# EAGLE board omnetics_nano_breakout_v2 (EAGLE 8.2.2)
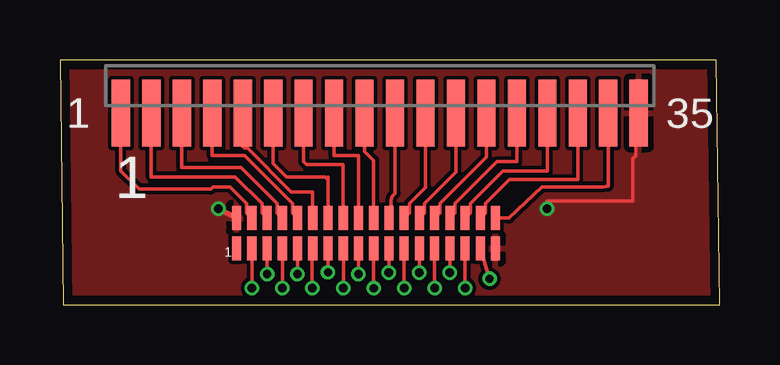
[diagram p0: board, top side]
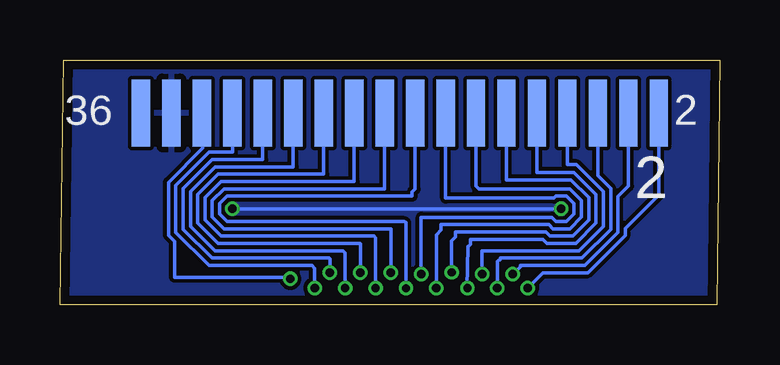
[diagram p1: board, bottom side, seen from below]

Size 27.51 x 10.21 mm. Coordinates in mm from the lower left corner, seen from the top.
Outline: 0.13,0 27.51,0 27.36,10.21 0,10.21 0.13,0
Copper layers (1*16): Top 0.035559375mm / dielectric 1.6mm / Bottom 0.035559375mm
Design rules "oshpark-2layer": minimum track width 6mil, minimum drill 10mil, track to track 6mil, track to pad 6mil, pad to pad 6mil, via to via 6mil, smd to smd 6mil, copper to edge 15mil, drill to drill 6mil, minimum pad ring 5mil, minimum via ring 5mil, stop-mask expansion 2.5mil, vias tented up to drill 0mil, thermal gap 10mil

## Footprints (pad centres in the part's own frame; a part is rotated, then mirrored left to right if it is on the bottom)
SFMC-118-L1-S-D = smd 0.762 x 2.794: 1 -10.795,-2.032; 3 -9.525,-2.032; 5 -8.255,-2.032; 7 -6.985,-2.032; 9 -5.715,-2.032; 11 -4.445,-2.032; 13 -3.175,-2.032; 15 -1.905,-2.032; 17 -0.635,-2.032; 19 0.635,-2.032; 21 1.905,-2.032; 23 3.175,-2.032; 25 4.445,-2.032; 27 5.715,-2.032; 29 6.985,-2.032; 31 8.255,-2.032; 33 9.525,-2.032; 35 10.795,-2.032 | smd 0.762 x 2.794 bottom: 2 -10.795,-2.032; 4 -9.525,-2.032; 6 -8.255,-2.032; 8 -6.985,-2.032; 10 -5.715,-2.032; 12 -4.445,-2.032; 14 -3.175,-2.032; 16 -1.905,-2.032; 18 -0.635,-2.032; 20 0.635,-2.032; 22 1.905,-2.032; 24 3.175,-2.032; 26 4.445,-2.032; 28 5.715,-2.032; 30 6.985,-2.032; 32 8.255,-2.032; 34 9.525,-2.032; 36 10.795,-2.032
OMNETICS_NANO_18X2 = smd 0.381 x 1.016: GND0 0,1.27; GND34 10.795,0; P_1 0.635,1.27; P_2 0.635,0; P_3 1.27,1.27; P_4 1.27,0; P_5 1.905,1.27; P_6 1.905,0; P_7 2.54,1.27; P_8 2.54,0; P_9 3.175,1.27; P_10 3.175,0; P_11 3.81,1.27; P_12 3.81,0; P_13 4.445,1.27; P_14 4.445,0; P_15 5.08,1.27; P_16 5.08,0; P_17 5.715,1.27; P_18 5.715,0; P_19 6.35,1.27; P_20 6.35,0; P_21 6.985,1.27; P_22 6.985,0; P_23 7.62,1.27; P_24 7.62,0; P_25 8.255,1.27; P_26 8.255,0; P_27 8.89,1.27; P_28 8.89,0; P_29 9.525,1.27; P_30 9.525,0; P_31 10.16,1.27; P_32 10.16,0; REF0 0,0; REF33 10.795,1.27

## Placement (x,y rotation side)
U$1  SFMC-118-L1-S-D  [SFMC-118-L1-S-D]  13.34,10.03 0 top
U$2  OMNETICS_NANO_18X2  [OMNETICS_NANO_18X2]  7.37,2.35 0 top

## Library data of the parts
U$1 = tuckerLib
U$2 = Sombeck_lib

## Nets
AGND: U$1.33 U$2.REF33
GND: U$1.34 U$1.35 U$2.GND0 U$2.GND34
N$1: U$1.1 U$2.P_1
N$2: U$1.2 U$2.P_2
N$3: U$1.4 U$2.P_4
N$4: U$1.6 U$2.P_6
N$5: U$1.8 U$2.P_8
N$6: U$1.10 U$2.P_10
N$7: U$1.12 U$2.P_12
N$8: U$1.14 U$2.P_14
N$9: U$1.16 U$2.P_16
N$10: U$1.18 U$2.P_18
N$11: U$1.20 U$2.P_20
N$12: U$1.22 U$2.P_22
N$13: U$1.24 U$2.P_24
N$14: U$1.26 U$2.P_26
N$15: U$1.28 U$2.P_28
N$16: U$1.30 U$2.P_30
N$17: U$1.32 U$2.P_32
N$18: U$1.3 U$2.P_3
N$19: U$1.5 U$2.P_5
N$20: U$1.7 U$2.P_7
N$21: U$1.9 U$2.P_9
N$22: U$1.11 U$2.P_11
N$23: U$1.13 U$2.P_13
N$24: U$1.15 U$2.P_15
N$25: U$1.17 U$2.P_17
N$26: U$1.19 U$2.P_19
N$27: U$1.21 U$2.P_21
N$28: U$1.23 U$2.P_23
N$29: U$1.25 U$2.P_25
N$30: U$1.27 U$2.P_27
N$31: U$1.29 U$2.P_29
N$32: U$1.31 U$2.P_31

## Tracks (layer width: path | path; a pad name or v marks a point on that pad's centre or on a via)
AGND
  Top 0.152: U$1.33 22.86,4.95 22.65,4.91 20.1,4.91 18.73,3.62 U$2.REF33
GND  (via drill 0.35)
  Top 0.152: v20.32,4 20.32,4.32 23.88,4.32 23.88,6.1 24,6.22 24,8.19
  Top 0.203: 24,8.19 U$1.35
  Top 0.254: U$2.GND0 v6.6,4
  Bottom 0.152: v6.6,4 v20.32,4
  Bottom 0.203: 22.75,8.64 22.86,8.28 U$1.34
  pour Top: 0.13,10.16 27.3,10.16 27.3,0.25 27.18,0.13 0.25,0.13 0.13,9.91
  pour Bottom: 0.13,10.16 27.05,10.16 27.3,9.91 27.3,0.25 27.18,0.13 0.38,0.13 0.38,9.91
N$1
  Top 0.152: U$2.P_1 7.79,3.83 7.79,4.22 7.09,4.91 6.38,4.91 6.3,4.83 3.3,4.83 2.54,5.59 U$1.1
N$2  (via drill 0.35)
  Top 0.152: U$2.P_2 v8,0.7
  Bottom 0.152: 8,0.76 v8,0.7 7.36,1.34 7.2,1.34 5.5,1.34 3.94,2.9 3.94,3.17 2.54,4.57 U$1.2
N$3  (via drill 0.35)
  Top 0.152: U$2.P_4 v8.64,1.27
  Bottom 0.152: v8.64,1.27 8.32,1.59 | 8.32,1.59 8.31,1.6 | 8.32,1.59 8.32,1.64 7.58,1.64 7.47,1.64 7.31,1.64 5.63,1.64 4.25,3.02 4.25,4.52 3.81,4.95 U$1.4
N$4  (via drill 0.35)
  Top 0.152: U$2.P_6 v9.27,0.7
  Bottom 0.152: v9.27,0.7 9.27,1.8 9.22,1.85 9.19,1.87 | 9.19,1.87 | 9.19,1.87 9.16,1.88 9.15,1.91 9.15,1.95 7.46,1.95 7.35,1.95 5.75,1.95 4.55,3.15 4.55,4.85 5.08,5.38 U$1.6
N$5  (via drill 0.35)
  Top 0.152: U$2.P_8 v9.91,1.27
  Bottom 0.152: v9.91,1.27 9.91,2.25 7.33,2.25 5.88,2.25 4.85,3.28 4.85,4.72 5.97,5.84 6.35,5.84 U$1.8
N$6  (via drill 0.35)
  Top 0.152: v10.52,0.7 10.52,2.33 U$2.P_10
  Bottom 0.152: v10.52,0.7 10.54,0.72 10.49,2.42 | 10.49,2.44 10.49,2.42 | 10.49,2.42 10.39,2.51 10.39,2.73 7.38,2.73 7.2,2.56 6,2.56 5.16,3.4 5.16,4.6 6.07,5.51 7.62,5.51 U$1.10
N$7  (via drill 0.35)
  Top 0.152: U$2.P_12 arc90 11.18,2.22 v11.18,1.35
  Bottom 0.152: v11.18,1.35 11.18,2.67 11.02,2.82 11.02,3.03 7.25,3.03 7.08,2.86 6.13,2.86 5.46,3.53 5.46,4.47 6.2,5.21 8.89,5.21 U$1.12
N$8  (via drill 0.35)
  Top 0.152: U$2.P_14 arc90 11.82,2.23 v11.82,0.7
  Bottom 0.152: v11.82,0.7 11.82,2.92 11.61,3.12 11.61,3.34 7.12,3.34 6.95,3.17 6.26,3.17 5.77,3.65 5.77,4.35 6.26,4.84 10.04,4.84 10.16,4.95 U$1.14
N$9  (via drill 0.35)
  Top 0.152: U$2.P_16 v12.45,1.27
  Bottom 0.152: U$1.16 11.43,4.44 6.91,4.44 6.82,4.53 6.38,4.53 6.07,4.22 6.07,3.78 6.38,3.47 6.82,3.47 7,3.64 12.45,3.64 v12.45,1.27
N$10  (via drill 0.35)
  Top 0.152: U$2.P_18 v13.08,0.68
  Bottom 0.152: v13.08,0.68 13.08,3.43 13.17,3.47 20.1,3.47 20.54,3.47 20.85,3.78 20.85,4.22 20.54,4.53 20.1,4.53 12.83,4.53 12.83,4.7 12.7,4.83 U$1.18
N$11  (via drill 0.35)
  Top 0.152: U$2.P_20 v13.72,1.33
  Bottom 0.152: v13.72,1.33 13.72,3.14 13.72,3.16 20.12,3.17 20.67,3.17 21.16,3.65 21.16,4.35 20.67,4.84 20.19,4.84 19.97,4.84 13.97,4.83 13.97,4.95 U$1.20
N$12  (via drill 0.35)
  Top 0.152: U$2.P_22 v14.35,0.7
  Bottom 0.152: 14.46,0.8 v14.35,0.7 14.35,1.4 14.35,1.54 14.35,2.79 14.42,2.86 20.06,2.86 20.79,2.86 21.46,3.53 21.46,4.47 20.79,5.14 20.14,5.14 20.06,5.14 | 20.06,5.14 | 20.06,5.14 19.87,5.14 15.24,5.14 U$1.22
N$13  (via drill 0.35)
  Top 0.152: U$2.P_24 v14.99,1.33
  Bottom 0.152: 16.51,8.64 U$1.24 16.51,5.44 19.75,5.44 19.94,5.45 | v14.99,1.33 14.99,2.54 15,2.55 20,2.55 20.92,2.55 21.77,3.4 21.77,4.6 20.92,5.45 19.99,5.45 19.94,5.45 | 19.94,5.45
N$14  (via drill 0.35)
  Top 0.152: U$2.P_26 v15.62,0.7
  Bottom 0.152: v15.62,0.7 15.62,2.16 15.71,2.25 19.93,2.25 21.05,2.25 22.07,3.28 22.07,4.72 21.05,5.75 19.95,5.75 19.81,5.75 | 19.81,5.75 | 19.81,5.75 17.78,5.75 U$1.26 | 19.81,5.75
N$15  (via drill 0.35)
  Top 0.152: U$2.P_28 v16.26,1.33
  Bottom 0.152: v16.26,1.33 16.26,1.91 16.3,1.95 19.9,1.95 21.17,1.95 22.38,3.15 22.38,4.85 21.17,6.05 19.88,6.05 19.82,6.05 | 19.82,6.05 | 19.82,6.05 19.8,6.05 19.68,6.05 19.05,6.05 U$1.28
N$16  (via drill 0.35)
  Top 0.152: U$2.P_30 v16.89,0.7
  Bottom 0.152: v16.89,0.7 16.89,1.52 17.01,1.64 19.89,1.64 21.3,1.64 22.68,3.02 22.68,4.98 21.3,6.36 20.32,6.36 U$1.30
N$17  (via drill 0.35)
  Top 0.152: U$2.P_32 v17.91,1.08
  Bottom 0.152: 21.56,8.64 U$1.32 21.56,8 21.56,6.53 22.98,5.1 22.98,2.9 22.73,2.65 22.73,1.14 17.97,1.14 v17.91,1.08
N$18
  Top 0.152: U$2.P_3 8.42,3.83 8.42,4.22 7.31,5.33 3.81,5.33 U$1.3
N$19
  Top 0.152: U$2.P_5 9.05,3.83 9.05,4.22 7.56,5.71 5.08,5.71 U$1.5
N$20
  Top 0.152: U$2.P_7 9.69,3.83 9.69,4.22 7.69,6.22 6.35,6.22 U$1.7
N$21
  Top 0.152: U$2.P_9 10.54,4.7 9.64,4.7 7.82,6.53 7.7,6.53 7.62,6.6 U$1.9 7.62,7.62
N$22
  Top 0.152: U$2.P_11 11.18,5.21 | 11.18,5.21 11.18,5.33 | 11.18,5.21 11.05,5.33 9.44,5.33 8.89,5.88 U$1.11
N$23
  Top 0.152: U$2.P_13 11.81,5.84 10.29,5.84 10.16,5.97 U$1.13 10.16,7.49
N$24
  Top 0.152: U$2.P_15 12.45,6.22 11.43,6.22 11.43,7.35 | 11.43,7.35 11.43,7.24 | 11.43,7.35 U$1.15
N$25
  Top 0.152: U$1.17 12.7,6.4 13.08,6.02 U$2.P_17
N$26
  Top 0.152: U$2.P_19 13.8,3.96 13.8,4.35 13.84,4.51 13.97,4.64 U$1.19
N$27
  Top 0.152: U$2.P_21 14.57,3.83 14.57,4.22 15.24,4.89 U$1.21
N$28
  Top 0.152: U$2.P_23 15.2,3.83 15.2,4.22 16.51,5.53 U$1.23
N$29
  Top 0.152: U$2.P_25 15.84,3.83 15.84,4.22 17.78,6.17 U$1.25
N$30
  Top 0.152: U$2.P_27 16.47,3.83 16.47,4.22 18.22,5.97 19.05,5.97 U$1.27
N$31
  Top 0.152: U$2.P_29 17.11,3.83 17.11,4.22 18.47,5.59 20.32,5.59 U$1.29
N$32
  Top 0.152: U$2.P_31 17.74,3.83 17.74,4.22 18.74,5.22 19.98,5.22 20.11,5.22 21.59,5.22 U$1.31

## Text on the board
tPlace: 1
bPlace: 2